# EAGLE board Ex LED.KIT (EAGLE 7.4.0)

Size 26.6 x 19 mm. Coordinates in mm from the lower left corner, seen from the top.
Outline: 0,0 26.6,0 26.6,19 0,19 0,0
Copper layers (1*16): Top 0.035mm / dielectric 1.5mm / Bottom 0.035mm
Design rules "default": minimum track width 10mil, minimum drill 24mil, track to track 8mil, track to pad 8mil, pad to pad 8mil, via to via 8mil, smd to smd 8mil, copper to edge 40mil, drill to drill 8mil, minimum pad ring 10mil, minimum via ring 8mil, stop-mask expansion 4mil, vias tented up to drill 0mil, thermal gap 10mil

## Footprints (pad centres in the part's own frame; a part is rotated, then mirrored left to right if it is on the bottom)
1X08 = drill 1.016 long: 1 -8.89,0; 2 -6.35,0; 3 -3.81,0; 4 -1.27,0; 5 1.27,0; 6 3.81,0; 7 6.35,0; 8 8.89,0
CHIPLED_0805 = smd 1.2 x 1.2: A 0,-1.05; C 0,1.05
1X10-BIG = drill 1.016 pad 1.778 octagon: 1 -11.43,0; 2 -8.89,0; 3 -6.35,0; 4 -3.81,0; 5 -1.27,0; 6 1.27,0; 7 3.81,0; 8 6.35,0; 9 8.89,0; 10 11.43,0
SIP10 = drill 0.6 long: 1 -11.46,0; 2 -8.92,0; 3 -6.38,0; 4 -3.84,0; 5 -1.3,0; 6 1.24,0; 7 3.78,0; 8 6.32,0; 9 8.86,0; 10 11.4,0

## Placement (x,y rotation side)
8_GND  [1X08]  15.7,14 0 top
8_PWR  [1X08]  15.7,10 180 top
LED_PWR  [CHIPLED_0805]  3,12 90 top
NUSBIO_HEADER  PINHD-1X10  [1X10-BIG]  13.3,1.5 180 top
RA_300_OHM  [SIP10]  13,5.5 180 top

## Library data of the parts
8_GND 8_PWR = pinhead
LED_PWR NUSBIO_HEADER = adafruit
RA_300_OHM = resistor-sip

## Nets
GND: NUSBIO_HEADER.10 RA_300_OHM.1
GPIO0: 8_PWR.1 NUSBIO_HEADER.1
GPIO1: 8_PWR.2 NUSBIO_HEADER.2
GPIO2: 8_PWR.3 NUSBIO_HEADER.3
GPIO3: 8_PWR.4 NUSBIO_HEADER.4
GPIO4: 8_PWR.5 NUSBIO_HEADER.5
GPIO5: 8_PWR.6 NUSBIO_HEADER.6
GPIO6: 8_PWR.7 NUSBIO_HEADER.7
GPIO7: 8_PWR.8 NUSBIO_HEADER.8
LED_RES_0: 8_GND.1 RA_300_OHM.9
LED_RES_1: 8_GND.2 RA_300_OHM.8
LED_RES_2: 8_GND.3 RA_300_OHM.7
LED_RES_3: 8_GND.4 RA_300_OHM.6
LED_RES_4: 8_GND.5 RA_300_OHM.4
LED_RES_5: 8_GND.6 RA_300_OHM.5
LED_RES_6: 8_GND.7 RA_300_OHM.3
LED_RES_7: 8_GND.8 RA_300_OHM.2
N$1: LED_PWR.C RA_300_OHM.10
VCC: LED_PWR.A NUSBIO_HEADER.9

## Tracks (layer width: path | path; a pad name or v marks a point on that pad's centre or on a via)
GND  (1 unrouted)
GPIO0  (1 unrouted)
GPIO1  (1 unrouted)
GPIO2  (1 unrouted)
GPIO3  (1 unrouted)
GPIO4  (1 unrouted)
GPIO5  (1 unrouted)
GPIO6  (1 unrouted)
GPIO7  (1 unrouted)
LED_RES_0  (1 unrouted)
LED_RES_1  (1 unrouted)
LED_RES_2  (1 unrouted)
LED_RES_3  (1 unrouted)
LED_RES_4  (1 unrouted)
LED_RES_5  (1 unrouted)
LED_RES_6  (1 unrouted)
LED_RES_7  (1 unrouted)
N$1  (1 unrouted)
VCC  (1 unrouted)

## Text on the board
tNames: NUSBIO LED KIT | + | 7 | 6 | 5 | 4 | 3 | 2 | 1 | 0 | NUSBIO_IN
bNames: MadeInTheUSB.net | PCBv1 2016.5